# Altium PCB clap_PCB.PcbDoc
Units mil, origin at the board's own origin, x right, y up, seen from the top; angles counter-clockwise.
Board outline 4420 x 1355 mil, 2 copper layers (Top Layer, Bottom Layer); 23 components, 15 nets, 62 pads, 0 vias.
Unrouted connection lines stored in the file: 1.
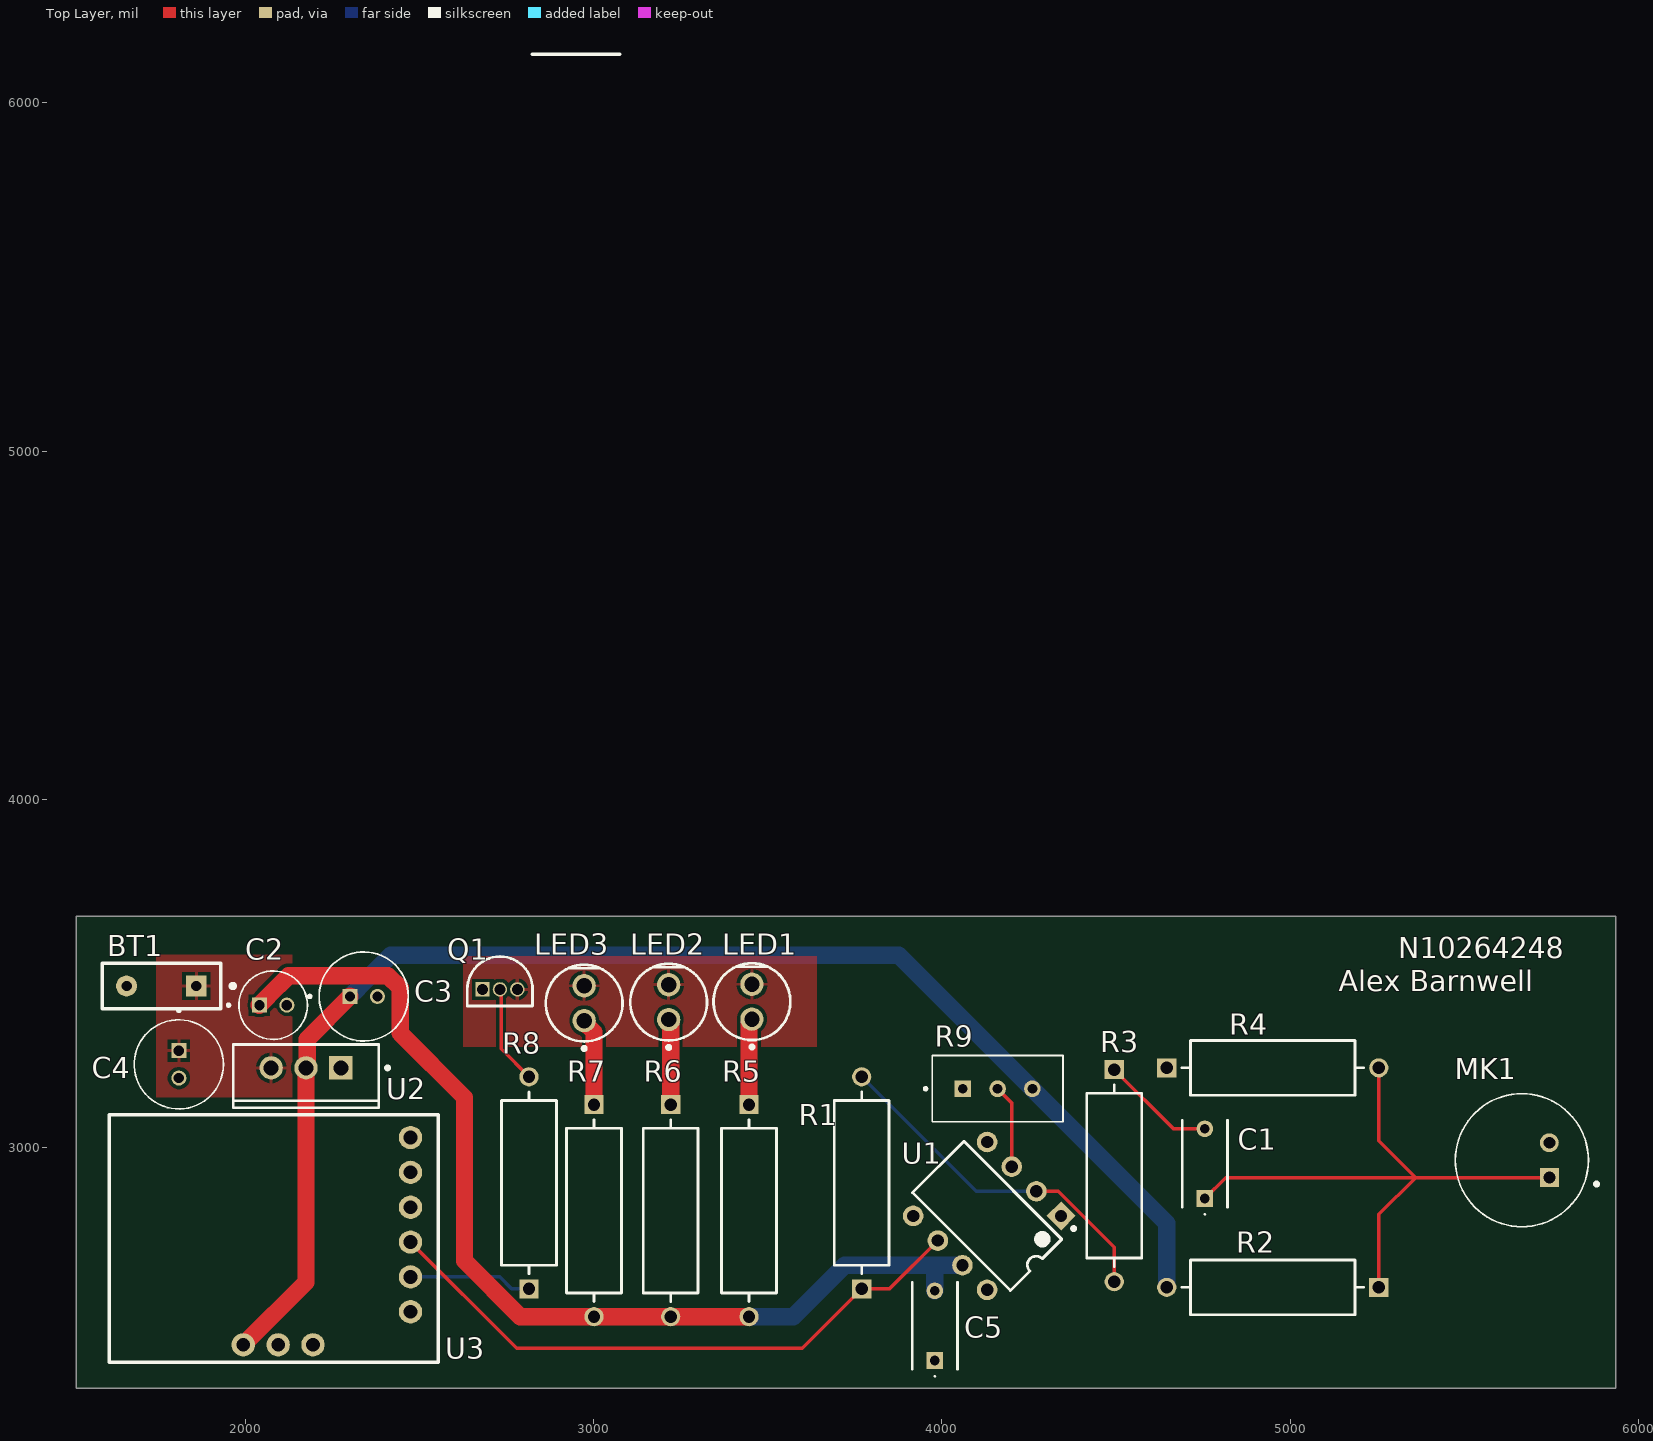
[diagram p0: Top Layer view]
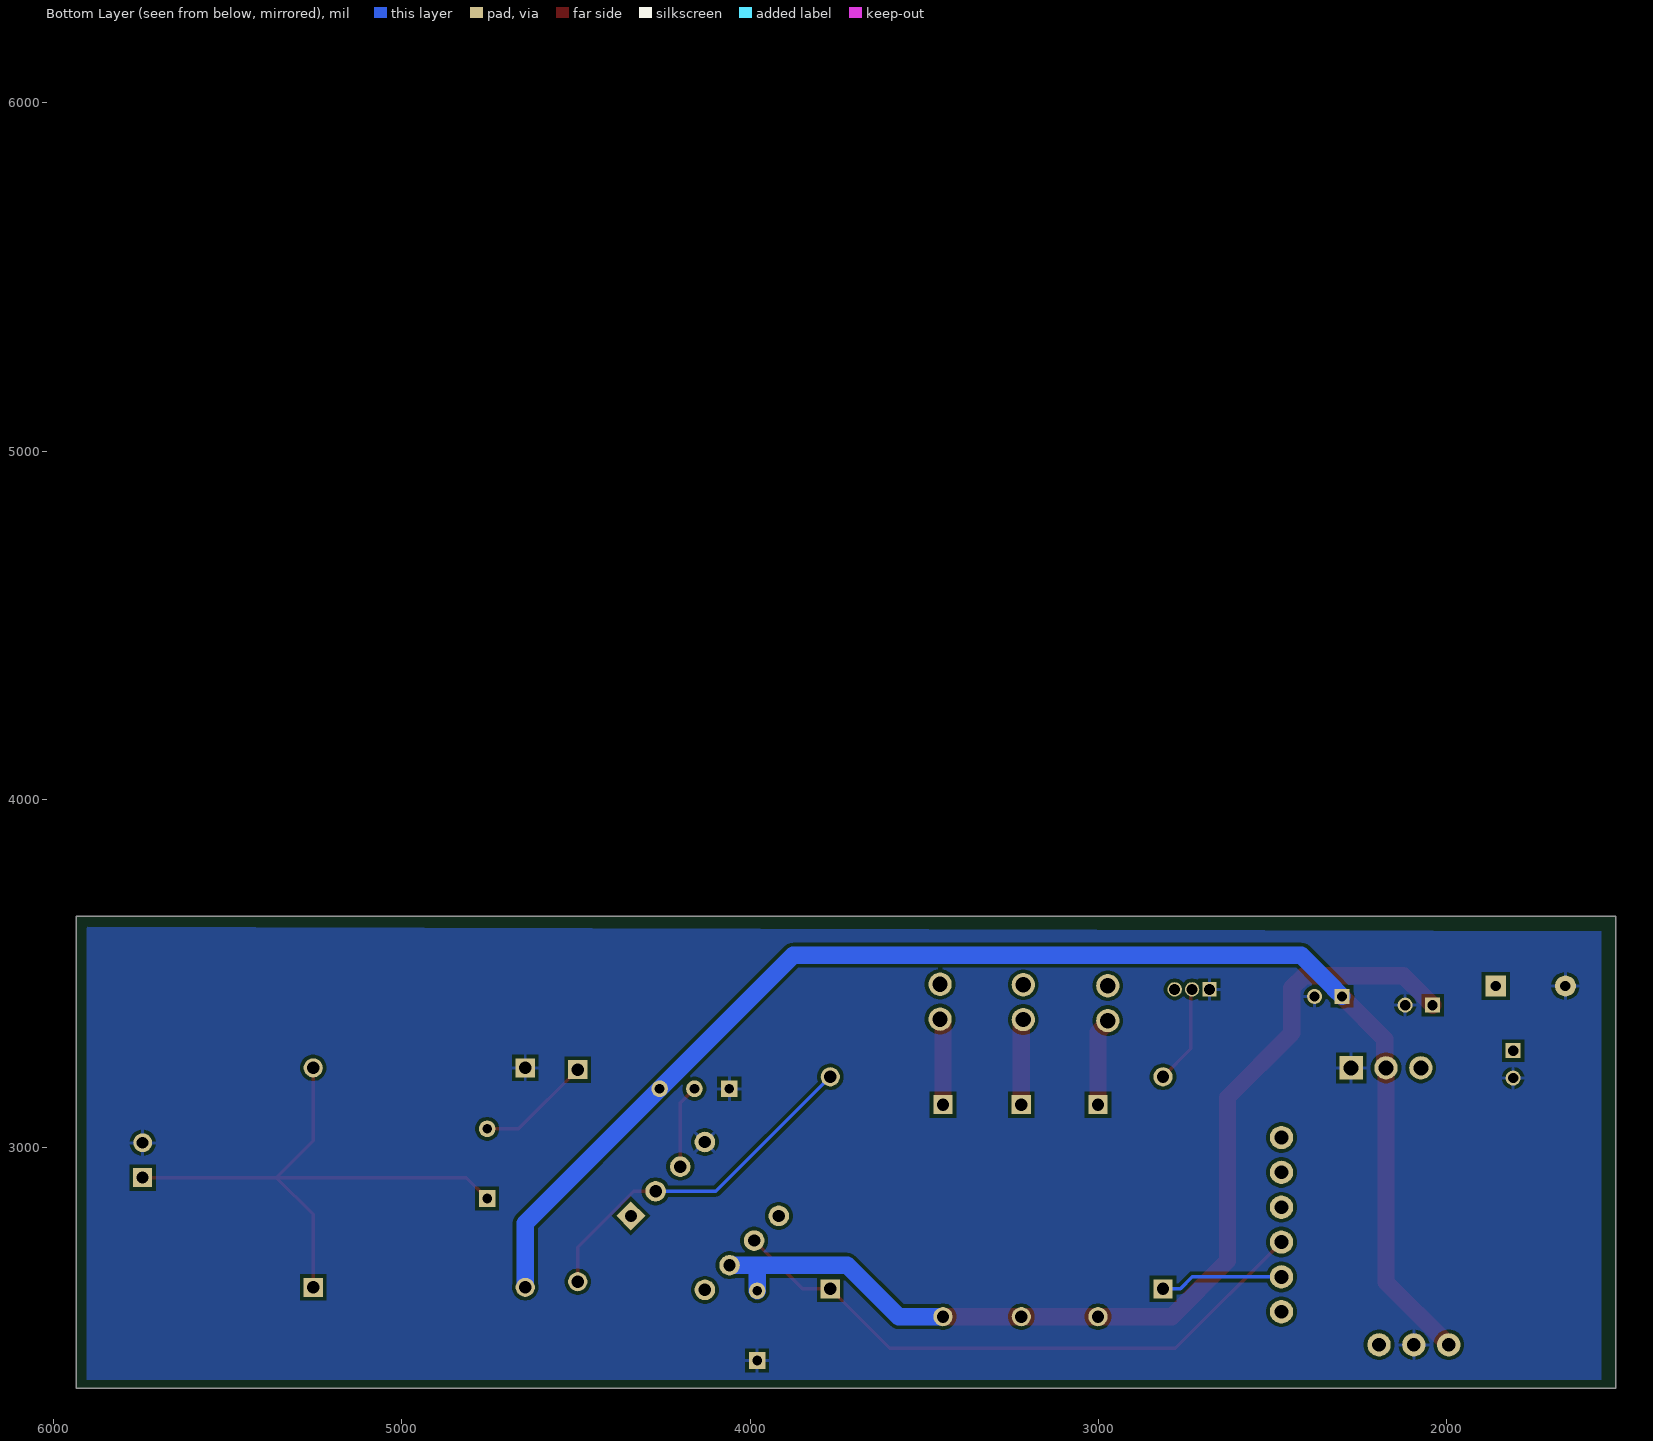
[diagram p1: Bottom Layer view, seen from below]
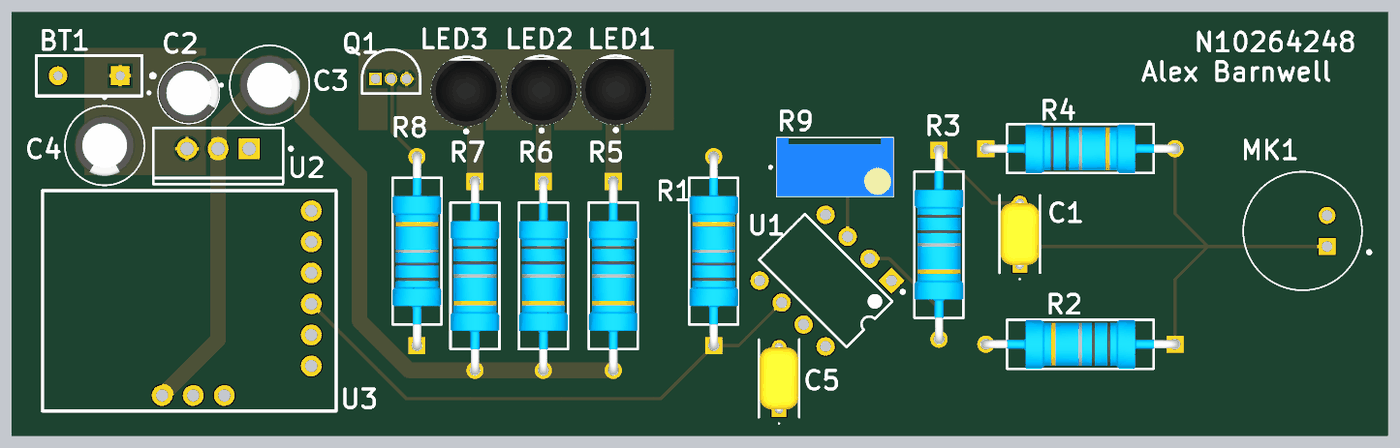
[diagram p2: 3D render of the assembled board from above, using the file's embedded part models]

## Layer stack, top to bottom
Top Solder: solder mask 0.4, Solder Resist, Dk 3.5
Top Layer: signal copper 1.4
Dielectric 1: dielectric 12.6, FR-4, Dk 4.8
Bottom Layer: signal copper 1.4
Bottom Solder: solder mask 0.4, Solder Resist, Dk 3.5

## Board outline
1515,2310 1515,3665 5935,3665 5935,2310

## Design rules (kind name [scope] priority, off if disabled: settings)
Clearance [All] p1: gap=10 ignorepadtopadclearanceinfootprint=FALSE except(0: Arc-Hole Track-Hole SMDPad-Hole THPad-Hole Via-Hole Fill-Hole Poly-Hole Region-Hole Text-Hole)
PolygonConnect [All] p1: connectstyle=Relief reliefconductorwidth=10 reliefentries=4 polygonreliefangle="90 Angle" airgapwidth=10
RoutingVias [All] p1: holewidth=28 width=50 viastyle="Through Hole" minholewidth=28 minwidth=50 maxholewidth=28 maxwidth=50
SolderMaskExpansion [All] p1: expansion=4 istentingtop=FALSE
Width [All] p1: maxlimit=100 minlimit=10 preferedwidth=10 minimp=50.000000 maximp=50.000000 favimp=50.000000
30 further rules are at their usual default settings.

## Components (designator, comment, footprint, x,y, rotation, side; value= is the part's Value field where it differs from the comment)
BT1 "9V Battery" Battery 1760,3460 r180 top
C1 "120nf" C322C334M5U5TA7301 4755,2855 r90 top
C2 "10uF" Ecap_Axial_2mm_5mm 2080.63,3410 r0 top
C3 "50uF" Ecap_Axial_2mm_6.5mm 2340.63,3435 r0 top
C4 "50uF" Ecap_Axial_2mm_6.5mm 1810,3240 r270 top
C5 "120nf" C322C334M5U5TA7301 3980,2390 r90 top
LED1 "LED Orange" "LED 3D" 3455,3420 r90 top
LED2 "LED Red" "LED 3D" 3215.97,3418.68 r90 top
LED3 "LED Green" "LED 3D" 2973.46,3415.72 r90 top
MK1 "MIC" MIC 5665,2965 r0 top
Q1 "2N3904" "2N3904 (straight)" 2681.69,3455.22 r0 top
R1 "56k" "Res through hole" 3770,2900 r90 top
R2 "10k" "Res through hole" 4950,2600 r180 top
R3 "1k" "Res through hole" 4495,2920.67 r270 top
R4 "56k" "Res through hole" 4950,3230 r0 top
R5 "100R" "Res through hole" 3446.69,2820.22 r270 top
R6 "100R" "Res through hole" 3221.69,2820.22 r270 top
R7 "100R" "Res through hole" 3001.69,2820.22 r270 top
R8 "1k" "Res through hole" 2815,2900 r90 top
R9 "20k POT" TRIM_3296W-1-203RLF 4160,3170 r0 top
U1 "LM301AN" LM301AN 4130,2805 r225 top
U2 "LT1085" "LT1085 (TO220)" 2175,3230 r270 top
U3 "ATtiny 85" "Disgispark ATtiny 85" 2095,2810 r90 top

## Footprints (in the part's own frame and the unit in brackets; to place one, negate y for a bottom-side part, rotate by r counter-clockwise, add the part's x,y. Pads: shape width x height; smd on the part's side, far side on the other; paste and mask are expansions set on the pad)
"2N3904 (straight)" [mm] "TO, 3-Leads, Body Dia 4.79mm, Pitch 1.27mm"
  rect 1.05x1.05 hole 0.8 mask+0.05: 1(0,0)
  round 1.05 hole 0.8 mask+0.05: 2(1.27,0) 3(2.54,0)
  silkscreen extent -1.11,-1.21 3.65,2.4, body extent -1.11,-1.21 3.65,2.4, height 5.33
Battery [mil]
  rect 60x60 hole 30: 1(-100,-5)
  round 60 hole 30: 2(100,-5)
  silkscreen extent -212,-70 170,60
C322C334M5U5TA7301 [mm] "120nF through hole capacitor"
  rect 1.217x1.217 hole 0.71: 1(0,0)
  round 1.217 hole 0.71: 2(5.08,0)
  silkscreen extent -1.2,-1.65 5.71,1.65, body extent -0.25,-1.6 5.33,1.59, height 6.98
"Disgispark ATtiny 85" [mm]
  round 1.7 hole 1: 1(-9.525,2.54) 2(-9.525,0) 3(-9.525,-2.54) 4(-7.112,-9.652) 5(-4.572,-9.652) 6(-2.032,-9.652) 7(0.508,-9.652) 8(3.048,-9.652) 9(5.588,-9.652)
  silkscreen extent -10.8,-11.68 7.24,12.32
Ecap_Axial_2mm_5mm [mm]
  rect 1.1x1.1 hole 0.75: 1(-1,0)
  round 1.1 hole 0.75: 2(1,0)
  silkscreen extent -3.35,-2.5 2.5,2.5, body extent -2.5,-2.5 2.5,2.5, height 11
Ecap_Axial_2mm_6.5mm [mm]
  rect 1.1x1.1 hole 0.75: 1(-1,0)
  round 1.1 hole 0.75: 2(1,0)
  silkscreen extent -4.04,-3.25 3.25,3.25, body extent -2.5,-2.5 2.5,2.5, height 11
"LED 3D" [mm]
  round 1.7 hole 1.12: 1(-1.27,0) 2(1.27,0)
  silkscreen extent -3.43,-2.8 2.8,2.8, body extent -2.9,-2.9 2.5,2.9, height 10.15
LM301AN [mm] "DIP, 8-Leads, Body 10x7.1mm, Pitch 2.54mm"
  rect 1.5x1.5 hole 0.9: 1(-3.81,3.81)
  round 1.5 hole 0.9: 2(-3.81,1.27) 3(-3.81,-1.27) 4(-3.81,-3.81) 5(3.81,-3.81) 6(3.81,-1.27) 7(3.81,1.27) 8(3.81,3.81)
  silkscreen extent -3.93,-5.05 2.65,5.23, body extent -3.95,-5 3.95,5, height 5.33
"LT1085 (TO220)" [mm] "T, 3-Leads, Body 10.55x4.6mm, Pitch 2.54mm"
  rect 1.7x1.7 hole 1.1: 1(0,2.54)
  round 1.7 hole 1.1: 2(0,0) 3(0,-2.54)
  silkscreen extent -1.7,-5.3 2.9,6.08, body extent -1.7,-5.28 2.9,5.28, height 22.15
MIC [mm]
  rect 1.378x1.378 hole 0.87: 1(2,-1.27)
  round 1.378 hole 0.87: 2(2,1.27)
  silkscreen extent -4.85,-4.85 5.54,4.85
"Res through hole" [mm]
  rect 1.4x1.4 hole 0.9 paste-1000 mask+0: 1(-7.73,0)
  round 1.4 hole 0.9 paste-1000 mask+0: 2(7.73,0)
  silkscreen extent -6.63,-2 6.63,2, body extent -8.53,-2.1 8.53,2.1, height 0.25
TRIM_3296W-1-203RLF [mm]
  rect 1.218x1.218 hole 0.71: 1(-2.54,0)
  round 1.218 hole 0.71: 2(0,0) 3(2.54,0)
  silkscreen extent -5.35,-2.41 4.76,2.42, body extent -4.76,-2.42 4.76,2.41, height 11.55

## Part data
C1 C5: library part 120nF, "120nF Capacitor", LatestRevisionDate=17-Jul-2002, LatestRevisionNote="Re-released for DXP Platform.", PackageDescription="Radial Cap, Thru-Hole; 2 Leads; 0.3 in Pin Spacing", PackageReference=RAD-0.3, Published=8-Jun-2000, Publisher="Altium Limited"
C2: "10uF electrolytic capacitor", LatestRevisionDate=29-May-2009, LatestRevisionNote="IPC-7351 Footprint Added.", PackageDescription="Chip Capacitor", PackageReference=C0805, Published=8-Jun-2000, Publisher="Altium Limited"
C3 C4: "50uF electrolytic capacitor", LatestRevisionDate=29-May-2009, LatestRevisionNote="IPC-7351 Footprint Added.", PackageDescription="Chip Capacitor", PackageReference=C0805, Published=8-Jun-2000, Publisher="Altium Limited"
LED1: "Orange LED", Forward Current=100mA, Forward Voltage=3V, Manufacturer=Vishay, Operating Temp Range=-40Cto85C, Operating Temperature Classification=Industrial, Package Description="2-Pin Through Hole Device, Dia 5.8 mm, Pitch 2.54 mm", Package Reference=TSAL6200, Package Type=T-13/4, Power Dissipation=160W, Reverse Voltage=5V, Chip Material=GaAlAs, Datasheet URL=http://www.vishay.com/docs/81010/tsal6200.pdf, Datasheet Version="Rev. 2.4, 03/2014", DELETED=Compliant, High Brightness=Yes, Lens Dimensions=5x5x7.7mm, Lens Type=Colored, Lum Intensity=500mW/srmcd, Luminous Intensity=500mW/sr, Main Category=IrLED, Manufacturer URL=http://www.vishay.com/, Mounting=ThroughHole, Mounting Technology=ThroughHole, Number of  Elements=1, Packaging=Bulk, Peak Wavelength=950nm, Pin Count=2, Product Depth (mm)=5.8mm, Product Height (mm)=8.7mm, Product Length (mm)=5.8mm, Rad Hardened=No, Shape Type=Circular, Test Current (It)=100mA, Type=IrLED, Viewing Angle=34deg
LED2: "Red LED", Forward Current=100mA, Forward Voltage=3V, Manufacturer=Vishay, Operating Temp Range=-40Cto85C, Operating Temperature Classification=Industrial, Package Description="2-Pin Through Hole Device, Dia 5.8 mm, Pitch 2.54 mm", Package Reference=TSAL6200, Package Type=T-13/4, Power Dissipation=160W, Reverse Voltage=5V, Chip Material=GaAlAs, Datasheet URL=http://www.vishay.com/docs/81010/tsal6200.pdf, Datasheet Version="Rev. 2.4, 03/2014", DELETED=Compliant, High Brightness=Yes, Lens Dimensions=5x5x7.7mm, Lens Type=Colored, Lum Intensity=500mW/srmcd, Luminous Intensity=500mW/sr, Main Category=IrLED, Manufacturer URL=http://www.vishay.com/, Mounting=ThroughHole, Mounting Technology=ThroughHole, Number of  Elements=1, Packaging=Bulk, Peak Wavelength=950nm, Pin Count=2, Product Depth (mm)=5.8mm, Product Height (mm)=8.7mm, Product Length (mm)=5.8mm, Rad Hardened=No, Shape Type=Circular, Test Current (It)=100mA, Type=IrLED, Viewing Angle=34deg
LED3: "Green LED", Forward Current=100mA, Forward Voltage=3V, Manufacturer=Vishay, Operating Temp Range=-40Cto85C, Operating Temperature Classification=Industrial, Package Description="2-Pin Through Hole Device, Dia 5.8 mm, Pitch 2.54 mm", Package Reference=TSAL6200, Package Type=T-13/4, Power Dissipation=160W, Reverse Voltage=5V, Chip Material=GaAlAs, Datasheet URL=http://www.vishay.com/docs/81010/tsal6200.pdf, Datasheet Version="Rev. 2.4, 03/2014", DELETED=Compliant, High Brightness=Yes, Lens Dimensions=5x5x7.7mm, Lens Type=Colored, Lum Intensity=500mW/srmcd, Luminous Intensity=500mW/sr, Main Category=IrLED, Manufacturer URL=http://www.vishay.com/, Mounting=ThroughHole, Mounting Technology=ThroughHole, Number of  Elements=1, Packaging=Bulk, Peak Wavelength=950nm, Pin Count=2, Product Depth (mm)=5.8mm, Product Height (mm)=8.7mm, Product Length (mm)=5.8mm, Rad Hardened=No, Shape Type=Circular, Test Current (It)=100mA, Type=IrLED, Viewing Angle=34deg
MK1: "CMA Series 9.7 mm Electret Condenser Omni-Directional Pin Mount 3 V Microphone", Package=None, Availability=Unavailable, MP=CMA-4544PF-W, Price=None
Q1: "2N3904 NPN General-Purpose Amplifier, 40 V VCEO, 0.2 A, -55 to 150 degC, 2-Pin TO-92, RoHS, Bulk", Manufacturer=FairchildSemiconductor, Maximum Collector Base Voltage=60V, Maximum Collector Emitter Saturation Voltage=0.2@1mA@10mA|0.3@5mA@50mAV, Maximum Collector Emitter Voltage=40V, Maximum DC Collector Current=0.2A, Maximum Operating Frequency=300(Min)MHz, Maximum Power Dissipation=625mW, Minimum DC Current Gain=40@0.1mA@1V|70@1mA@1V|100@10mA@1V|60@50mA@1V|30@100mA@1V, Operating Temperature=-55to150degC, Package=3TO-92, Package Description="3-Pin Transistor Outline Package, Body Dia 4.79 mm, Pitch 1.27 mm", Package Reference=TO-92, Category=GPBJT, Datasheet URL=https://datasheet.ciiva.com/4722/2n3904-82270-4722369.pdf, Datasheet Version="Rev. 1.1.0, 10/2014", Manufacturer URL=https://www.fairchildsemi.com/, Mounting=ThroughHole, Packaging=Bulk, Pin Count=3, Rad Hard=No, Type=NPN
R1 R4: "56k Resistor", LatestRevisionDate=17-Jul-2002, LatestRevisionNote="Re-released for DXP Platform.", PackageDescription="Axial Device, Thru-Hole; 2 Leads; 0.3 in Pin Spacing", PackageReference=AXIAL-0.3, Published=8-Jun-2000, Publisher="Altium Limited"
R2: "10k Resistor", LatestRevisionDate=17-Jul-2002, LatestRevisionNote="Re-released for DXP Platform.", PackageDescription="Axial Device, Thru-Hole; 2 Leads; 0.3 in Pin Spacing", PackageReference=AXIAL-0.3, Published=8-Jun-2000, Publisher="Altium Limited"
R3 R8: "1k Resistor", LatestRevisionDate=17-Jul-2002, LatestRevisionNote="Re-released for DXP Platform.", PackageDescription="Axial Device, Thru-Hole; 2 Leads; 0.3 in Pin Spacing", PackageReference=AXIAL-0.3, Published=8-Jun-2000, Publisher="Altium Limited"
R5 R6 R7: "Resistor", LatestRevisionDate=17-Jul-2002, LatestRevisionNote="Re-released for DXP Platform.", PackageDescription="Axial Device, Thru-Hole; 2 Leads; 0.3 in Pin Spacing", PackageReference=AXIAL-0.3, Published=8-Jun-2000, Publisher="Altium Limited"
R9: "20k Potentiometer", LatestRevisionDate=17-Jul-2002, LatestRevisionNote="Re-released for DXP Platform.", PackageDescription="Variable Resistor, Thru-Hole; 3 Leads", PackageReference=VR5, Published=8-Jun-2000, Publisher="Altium Limited", Set Position=0.5, Sim Note="Enter the Resistance value and the set point into parameter fields."
U1: "Operational Amplifier, 8-pin MDIP", Manufacturer="National Semiconductor", PackageTopMarking=NSUZXYTTE#*LM*301AN, PowerWise=N, Code_JEDEC=MS-001-BA, ComponentLink1Description="LM301A Datasheet", ComponentLink1URL=http://www.national.com/ds/LM/LM301A.pdf, ComponentLink2Description="LM301A Web Page", ComponentLink2URL=http://www.national.com/pf/LM/LM301A.html, ComponentLink3Description="N08E Package Page", ComponentLink3URL=http://www.national.com/packaging/folders/n08e.html, CompType=Amplifiers, DatasheetVersion=Aug-2000, PackageDescription="MDIP, .365 x .250 x .130in, 8 Lead, .100in Pitch", PackageReference=N08E, PackageVersion="revG, May-2006", PinCount=8, RevisionNote="Component URLs added", RoHS=N
U2: "3 A Low Dropout Positive Regulator, 4.3 to 25 V Vin, 3.3 V Vout, 3-pin FM (T-3), 0 to 150 degC, Pb-Free", Dropout Voltage(V)=1.3, Manufacturer="Linear Technology", Output Voltage="3.3 V", PartNumber=LT1085CT-3.3#PBF, ComponentLink1Description="Manufacturer URL", ComponentLink1URL=http://www.linear.com/, ComponentLink2Description=Datasheet, ComponentLink2URL=http://cds.linear.com/docs/en/datasheet/1083ffd.pdf, ComponentLink3Description="Package Specification", ComponentLink3URL=http://cds.linear.com/docs/en/packaging/TO-220_3_05-08-1420.pdf, DatasheetVersion="Rev. D", Discrete Pass Element=no, Iout(mA)=3000, Isupply(mA)=5, Mounting Technology="Through Hole", Number of Outputs=1, PackageDescription="3-Pin Plastic TO-220, Body 10.2235 x 4.3815 mm, Pitch 2.54 mm", PackageReference=T-3, PackageVersion=Jun-10, PSRR(dB)=72, RoHS=TRUE, Vin Max(V)=25, Vin Min(V)=4.3
U3: "the mount for the digispark ATtiny 85 board"
BT1: LatestRevisionDate=17-Jul-2002, LatestRevisionNote="Re-released for DXP Platform.", PackageDescription="Battery; 2 Leads", PackageReference=BAT-2, Published=24-Mar-1999, Publisher="Altium Limited"

## Nets (pads, with @x,y where several pads share a name; then routed paths per layer and width w, separated by ;. In a path a pad name is that pad's centre, name@x,y a point inside that pad or via, vN(x,y) a via of type N, cw(c..) or ccw(c..) an arc to the next point about the centre after c; other vN are vias at no path point)
+5: C3.1 R2.2 R9.3 U2.2 U3.1 | length 4019.7
  Top Layer w50: U3.1 2175,2615 U2.2 ; U2.2@2178.24,3233.24 2178.24,3311.98 C3.1
  Bottom Layer w50: C3.1 2323.35,3457.09 2323.35,3458.47 2418.56,3553.68 3876.32,3553.68 R9.3 4645.67,2784.33 R2.2
+9: BT1.1 C2.1 C4.1 C5.2 R5.2 R6.2 R7.2 U1.7 U2.3 | length 2948.7
  Top Layer w50: C2.1@2041.26,3411.38 C2.1 2063.35,3432.09 2063.35,3433.47 2124.88,3495 2410,3495 2445,3460 2445,3330 2630,3145 2630,2676.05 2790.16,2515.89 R7.2 R6.2 R5.2
  Bottom Layer w50: R5.2 3573.61,2515.89 3721.3,2663.58 3985,2663.58 ; C5.2 3980,2658.58 3985,2663.58 ; U1.7 3985,2663.58
GND: BT1.2 C2.2 C3.2 C4.2 C5.1 MK1.2 Q1.1 R4.1 R9.1 U1.4 U2.1 U3.2
NetC1_1: C1.1 MK1.1 R2.1 R4.2 | length 1739.1
  Top Layer w10: C1.1 4815,2915 5360,2915 ; R2.1 5254.33,2809.33 5360,2915 ; R4.2@5260,3224.33 R4.2 5254.33,3020.67 5360,2915 ; MK1.1 5360,2915
NetC1_2: C1.2 R3.1 | length 330.4
  Top Layer w10: R3.1 4665,3055 C1.2
NetLED1_1: LED1.1 R5.1 | length 248.9
  Top Layer w50: R5.1 3446.69,3357.11 3455,3365.42 LED1.1
NetLED1_2: LED1.2 LED2.2 LED3.2 Q1.3
NetLED2_1: LED2.1 R6.1 | length 246.5
  Top Layer w50: LED2.1 3215.97,3364.1 3221.69,3358.38 R6.1
NetLED3_1: LED3.1 R7.1 | length 252.9
  Top Layer w50: LED3.1 2973.46,3361.14 3001.69,3332.92 R7.1
NetQ1_2: Q1.2 R8.2 | length 285.4
  Top Layer w10: Q1.2 2735,3451.91 2735,3284.33 R8.2
NetR1_2: R1.2 R3.2 U1.2 | length 1026.4
  Top Layer w10: U1.2 4334.39,2875.71 4495,2715.1 R3.2
  Bottom Layer w10: R1.2 4098.62,2875.71 U1.2
NetR9_2: R9.2 U1.3 | length 240.4
  Top Layer w10: R9.2 4200.71,3129.29 U1.3
P1: R8.1 U3.5 | length 354.2
  Bottom Layer w10: U3.5 2730.67,2630 2765,2595.67 R8.1
P2: R1.1 U1.6 U3.6 | length 1768
  Top Layer w10: U3.6 2780,2425 3599.33,2425 R1.1 3849.96,2595.67 U1.6
P3: U3.7
pads on no net: U1.1 U1.5 U1.8 U3.3 U3.4 U3.8 U3.9

## Polygon pours and split planes (outlines as drawn)
NetLED1_2 on Top Layer "NETLED1_2" (solid, pour order 2): 2626.69,3550.22 3641.69,3550.22 3641.69,3290.22 2626.69,3290.22
+9 on Top Layer "+9_power" (solid, pour order 1): 1745,3555 1800,3555 2135,3555 2135,3145 1745,3145
GND on Bottom Layer "GND_PLANE" (solid, pour order 0): 1557.5,2335 1557.5,3622.5 5905,3635 5905,3395 5905,2805 5905,2335

## Silkscreen, mask and mechanical layers (free items; w line width, h text height)
Top Overlay:
  lines w10: 2825,6140 3075,6140
  text "N10264248" at 5310,3545 h60
  text "Alex Barnwell" at 5140,3450 h60
Board dimensions:
  the board outline again, w10